# Altium PCB mini-ET.PcbDoc (part 2 of 2)
Units mil, origin at the board's own origin, x right, y up, seen from the top; angles counter-clockwise.
Board outline 6299 x 3937 mil, 4 copper layers (TopLayer, Gnd, Power, BottomLayer); 129 components, 151 nets, 650 pads, 100 vias.
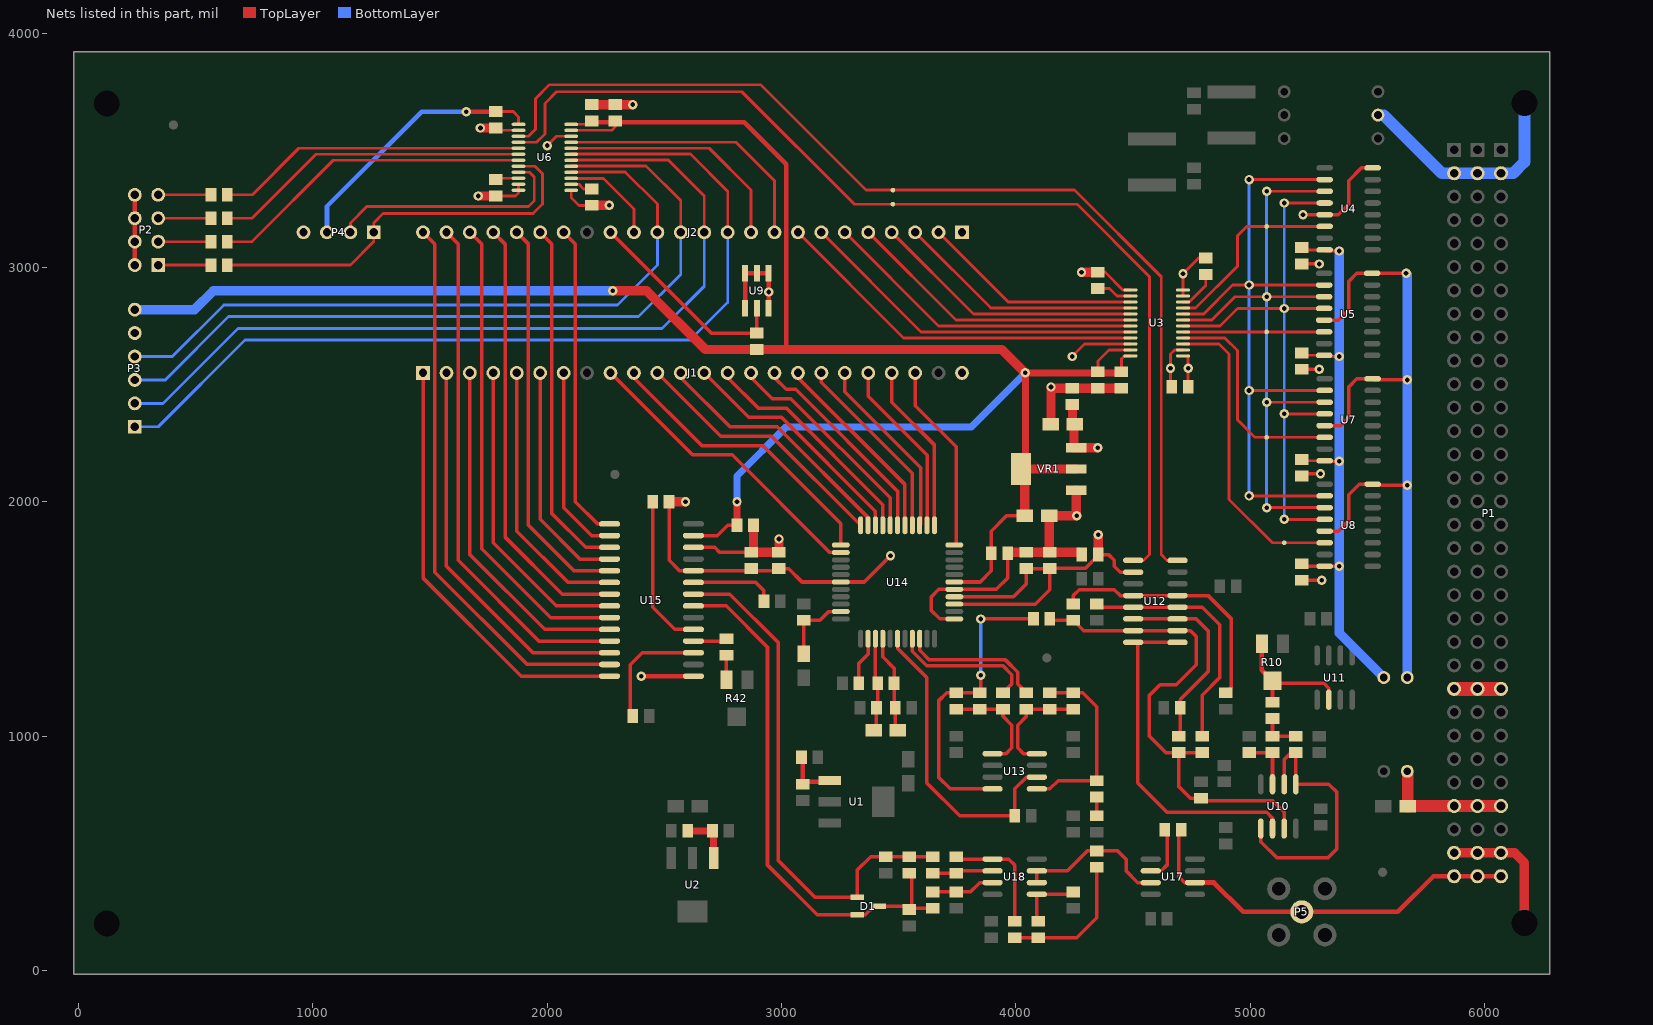
[diagram p4: the nets of this part, all layers, seen from the top]

## Via types
v1: diameter 40, hole 20, TopLayer to BottomLayer, 98 vias
v2: diameter 50, hole 28, TopLayer to BottomLayer, 2 vias

## Nets (pads, with @x,y where several pads share a name; then routed paths per layer and width w, separated by ;. In a path a pad name is that pad's centre, name@x,y a point inside that pad or via, vN(x,y) a via of type N, cw(c..) or ccw(c..) an arc to the next point about the centre after c; other vN are vias at no path point) (continued)
DGND: C20.2 C21.1 C22.1 C23.1 C24.1 C29.1 C30.1 C31.1 C32.1 C33.1 C34.1 C35.1 C36.1 C37.2 C39.1 C40.1 C41.1 C42.1 C43.1 C44.1 J2.1 L5.2 P2.2 P2.4 P2.6 P2.8 P3.5 P4.4 R5.1 R6.2 R39.1 R40.2 U3.2 U3.11 U3.12 U3.13 U3.22 U4.8 U4.13 U5.8 U5.13 U6.2 U6.11 U6.12 U6.13 U6.22 U7.8 U7.13 U8.8 U8.13 U9.1 U9.3 U9.4 U9.5 U9.6 U14.1 U14.5 U15.15 U15.26 VR1.1 | length 9099.2
  TopLayer w12: R39.1@1780,3304.96 1864.96,3304.96 1877.8,3317.8 U6.12@1877.8,3329.25 U6.11@1877.8,3354.84 ; C23.1@1780,3594.96 1789.8,3585.16 U6.2@1877.8,3585.16 ; v1(2000,3520) 2039.57,3559.57 U6.22@2102.2,3559.57 ; U6.13@2102.2,3329.25 2102.2,3297.8 2135.04,3264.96 R40.2@2190,3264.96 ; v1(4240,2620) 4293.43,2673.43 U3.22@4488.8,2673.43 ; R6.2@4350,2980.08 4379.92,2980.08 4456.25,2903.75 U3.13@4488.8,2903.75 ; C22.1@4664.96,2491.06 4660,2496.02 v1(4660,2570) 4660,2630 4677.84,2647.84 U3.2@4713.2,2647.84 ; U3.11@4713.2,2878.16 U3.12@4713.2,2903.75 v1(4713.2,2973.2) 4780.08,3040.08 R5.1@4810,3040.08
  TopLayer w15: U15.26@2624.13,1805.71 2714.29,1805.71 2734.96,1785.04 C33.1@2870,1785.04 ; U14.1@3737.13,1500.2 3674.61,1500.2 3639.8,1535 3639.8,1594.8 3671.18,1626.18 U14.5@3737.13,1626.18 3916.18,1626.18 3965.04,1675.04 C39.1@3965.04,1780 ; C29.1@5220,1664.96 v1(5304.96,1664.96) ; C30.1@5220,2110 5230,2120 v1(5300,2120) ; C31.1@5220,2564.96 v1(5295.04,2564.96) ; v1(5225,3225) U4.13@5317.64,3225 5375,3225 5420,3270 5420,3370 5475,3425 U4.8@5522.36,3425 ; C32.1@5234.96,3000 C32.1@5220,3014.96 v1(5294.96,3014.96) ; U5.13@5315.28,2775 5375,2775 5420,2820 5420,2940 5455,2975 U5.8@5520,2975 v1(5665,2975) ; U8.13@5317.64,1875 5375,1875 5420,1920 5420,2030 5465,2075 U8.8@5522.36,2075 5527.36,2070 v1(5670,2070) ; U7.13@5317.64,2325 5385,2325 5420,2360 5420,2490 5455,2525 U7.8@5522.36,2525 5527.36,2520 v1(5670,2520)
  TopLayer w20: P2.2@240,3010 P2.4@240,3110 P2.6@240,3210 P2.8@240,3310 ; v1(2400.71,1255.71) U15.15@2624.13,1255.71 ; U9.1@2845,2825.2 U9.6@2845,2974.8 U9.5@2895,2974.8 U9.4@2945,2974.8 v1(2945,2895) U9.3@2945,2825.2
  TopLayer w40: v1(1705.04,3304.96) R39.1@1780,3304.96 ; v1(1714.96,3594.96) C23.1@1780,3594.96 ; R40.2@2190,3264.96 v1(2265.04,3264.96) ; C42.1@2190,3695.04 C43.1@2290,3695.04 v1(2365.04,3695.04) ; C44.1@2880.04,1900 2880.04,1795.08 C33.1@2870,1785.04 C34.1@2988.9,1785.04 v1(2988.9,1841.1) ; C39.1@3975,1785.04 C36.1@4045,1785.04 C35.1@4145,1785.04 ; C20.2@4148.43,2330 4150,2331.57 v1(4150,2490) 4154.96,2485.04 C24.1@4240,2485.04 4305.04,2485.04 ; VR1.1@4258.11,2049.45 4258.11,1941.89 v1(4260,1940) C37.2@4141.57,1940 4141.57,1788.46 C35.1@4145,1785.04 ; v1(4280.08,2980.08) R6.2@4350,2980.08 ; C21.1@4281.02,1775 4270.98,1785.04 C35.1@4145,1785.04 ; 4309.92,2484.96 C41.1@4350,2484.96 C40.1@4450,2484.96
  BottomLayer w40: v1(5665,2975) 5670,2970 v1(5670,2520) v1(5670,2070) L5.2@5670,1250
DI0: J1.9 U14.24 | length 1300.3
  TopLayer w15: J1.9@2270,2550 2620,2200 2790,2200 3206.34,1783.66 U14.24@3252.87,1783.66
DI1: J1.10 U14.23 | length 1252.8
  TopLayer w15: J1.10@2370,2550 2370,2530 2660,2240 2920,2240 3252.87,1907.13 U14.23@3252.87,1815.16
DI2: J1.11 U14.22 | length 1136.8
  TopLayer w15: J1.11@2470,2550 2740,2280 2957.32,2280 U14.22@3337.52,1899.8
DI3: J1.12 U14.21 | length 1099.6
  TopLayer w15: J1.12@2570,2550 2570,2530 2780,2320 2982.11,2320 3369.02,1933.1 U14.21@3369.02,1899.8
DI4: J1.13 U14.20 | length 1034.8
  TopLayer w15: J1.13@2670,2550 2860,2360 3000,2360 3400.51,1959.49 U14.20@3400.51,1899.8
DI5: J1.14 U14.19 | length 994.7
  TopLayer w15: J1.14@2770,2550 2770,2530 2900,2400 3020,2400 3432.01,1987.99 U14.19@3432.01,1899.8
DI6: J1.15 U14.18 | length 942.9
  TopLayer w15: J1.15@2870,2550 2870,2530 2960,2440 3040,2440 3463.5,2016.5 U14.18@3463.5,1899.8
DI7: J1.16 U14.17 | length 891.1
  TopLayer w15: J1.16@2970,2550 2970,2530 3020,2480 3060,2480 3495,2045 U14.17@3495,1899.8
DI8: J1.17 U14.16 | length 839.3
  TopLayer w15: J1.17@3070,2550 3070,2530 3526.5,2073.5 U14.16@3526.5,1899.8
DI9: J1.18 U14.15 | length 810.9
  TopLayer w15: J1.18@3170,2550 3170,2510 3557.99,2122.01 U14.15@3557.99,1899.8
DI10: J1.19 U14.14 | length 786.8
  TopLayer w15: J1.19@3270,2550 3270,2470 3594.66,2145.34 3594.66,1904.97 U14.14@3589.49,1899.8
DI11: J1.20 U14.13 | length 754.2
  TopLayer w15: J1.20@3370,2550 3370,2450 3620.98,2199.02 U14.13@3620.98,1899.8
DI12: J1.21 U14.12 | length 739.9
  TopLayer w15: J1.21@3480,2540 J1.21@3470,2550 3470,2425 3652.48,2242.52 U14.12@3652.48,1899.8
DI13: J1.22 U14.11 | length 810.6
  TopLayer w15: J1.22@3570,2550 3570,2410 3745,2235 3745,1823.03 U14.11@3737.13,1815.16
DO0: J1.1 U15.14 | length 1844.5
  TopLayer w15: J1.1@1470,2550 1470,1675 1889.29,1255.71 U15.14@2265.87,1255.71
DO1: J2.24 U15.13 | length 2379.9
  TopLayer w15: J2.24@1470,3150 1520,3100 1520,1700 1914.29,1305.71 U15.13@2265.87,1305.71
DO2: J1.2 U15.12 | length 1673.8
  TopLayer w15: J1.2@1570,2550 1570,1725 1939.29,1355.71 U15.12@2265.87,1355.71
DO3: J2.23 U15.11 | length 2209.2
  TopLayer w15: J2.23@1570,3150 1620,3100 1620,1750 1964.29,1405.71 U15.11@2265.87,1405.71
DO4: J1.3 U15.10 | length 1503.1
  TopLayer w15: J1.3@1670,2550 1670,1775 1989.29,1455.71 U15.10@2265.87,1455.71
DO5: J2.22 U15.9 | length 2038.5
  TopLayer w15: J2.22@1670,3150 1720,3100 1720,1800 2014.29,1505.71 U15.9@2265.87,1505.71
DO6: J1.4 U15.8 | length 1332.4
  TopLayer w15: J1.4@1770,2550 1770,1825 2039.29,1555.71 U15.8@2265.87,1555.71
DO7: J2.21 U15.7 | length 1867.8
  TopLayer w15: J2.21@1770,3150 1820,3100 1820,1850 2064.29,1605.71 U15.7@2265.87,1605.71
DO8: J1.5 U15.6 | length 1161.7
  TopLayer w15: J1.5@1870,2550 1870,1875 2089.29,1655.71 U15.6@2265.87,1655.71
DO9: J2.20 U15.5 | length 1711.2
  TopLayer w15: J2.20@1880,3160 J2.20@1870,3150 1920,3100 1920,1900 2114.29,1705.71 U15.5@2265.87,1705.71
DO10: J1.6 U15.4 | length 991
  TopLayer w15: J1.6@1970,2550 1970,1925 2139.29,1755.71 U15.4@2265.87,1755.71
DO11: J2.19 U15.3 | length 1526.3
  TopLayer w15: J2.19@1970,3150 2020,3100 2020,1950 2164.29,1805.71 U15.3@2265.87,1805.71
DO12: J1.7 U15.2 | length 820.3
  TopLayer w15: J1.7@2070,2550 2070,1975 2189.29,1855.71 U15.2@2265.87,1855.71
DO13: J2.18 U15.1 | length 1355.6
  TopLayer w15: J2.18@2070,3150 2120,3100 2120,2000 2214.29,1905.71 U15.1@2265.87,1905.71
GND: C19.2 L2.1 L5.1 P1.97 P1.98 P1.A2 P1.A24 P1.A29 P1.A31 P1.B2 P1.B24 P1.B29 P1.B31 P1.C2 P1.C24 P1.C29 P1.C31 | length 2324.9
  TopLayer w40: P1.C31@5870,502 P1.B31@5970,502 P1.A31@6070,502 6128,502 6170,460 P1.98@6170,202
  TopLayer w50: L5.1@5670,850 5671.57,848.43 C19.2@5671.57,700 5673.57,702 P1.C29@5870,702 P1.B29@5970,702 P1.A29@6070,702
  TopLayer w60: P1.C24@5870,1202 P1.B24@5970,1202 P1.A24@6070,1202
  BottomLayer w50: L2.1@5545,3650 5570,3650 5818,3402 P1.C2@5870,3402 P1.B2@5970,3402 P1.A2@6070,3402 6122,3402 6170,3450 P1.97@6170,3702
IFF: J2.16 R9.2 U9.2 | length 908.3
  TopLayer w15: J2.16@2270,3150 2699.96,2720.04 R9.2@2895,2720.04 U9.2@2895,2825.2
LED0: J2.11 P3.1 U6.19 | length 3958.3
  TopLayer w12: U6.19@2102.2,3484.18 2610.82,3484.18 2770,3325 J2.11@2770,3150
  BottomLayer w12: P3.1@240,2320 340,2320 710,2690 2610,2690 2770,2850 J2.11@2770,3150
LED0B: R7.2 U6.5 | length 1324.9
  TopLayer w12: R7.2@635.04,3310 741.61,3310 940,3508.39 U6.5@1877.8,3508.39
LED1: J2.12 P3.2 U6.18 | length 3653.5
  TopLayer w12: U6.18@2102.2,3458.59 2516.41,3458.59 2670,3305 J2.12@2670,3150
  BottomLayer w12: P3.2@240,2420 360,2420 680,2740 2490,2740 2670,2920 J2.12@2670,3150
LED1B: R8.2 U6.6 | length 1355.8
  TopLayer w12: R8.2@635.04,3210 740,3210 1012.8,3482.8 U6.6@1877.8,3482.8
LED2: J2.13 P3.3 U6.17 | length 3360.5
  TopLayer w12: U6.17@2102.2,3433 2422,3433 2570,3285 J2.13@2570,3150
  BottomLayer w12: P3.3@240,2520 370,2520 640,2790 2390,2790 2570,2970 J2.13@2570,3150
LED2B: R30.1 U6.7 | length 1386.6
  TopLayer w12: R30.1@635.04,3110 740,3110 1087.2,3457.2 U6.7@1877.8,3457.2
MS: R13.2 R14.2 R15.2 R21.1 R25.2 U10.7 U12.7 U12.10 | length 2168.9
  TopLayer w15: R21.1@4145,1500 4151.1,1493.9 R15.2@4245,1493.9 4288.9,1450 U12.7@4500.51,1450 U12.10@4689.49,1450 4745,1450 4770,1425 4770,1305 4685,1220 4615,1220 4570,1175 4570,1000 4640.08,929.92 R13.2@4695,929.92 ; R14.2@4795,929.92 R13.2@4695,929.92 ; U10.7@5145,605.51 5145,675 5095,725 4799.96,725 R25.2@4790,734.96 4745.04,734.96 4695,785 R13.2@4695,929.92
NetC45_1: C45.1 R11.2 R12.1 | length 150
  TopLayer w15: R11.2@5095,1074.96 R12.1@5095,1000 C45.1@5170,1000
NetC45_2: C45.2 U10.1 U10.2 U10.5 | length 1158.7
  TopLayer w15: U10.5@5045,605.51 5045,550 5115,480 5330,480 5370,520 5370,760 5335.51,794.49 U10.1@5195,794.49 C45.2@5195,929.92 5174.92,929.92 5145,900 U10.2@5145,794.49
NetC46_2: C46.2 R12.2 U10.3 | length 235.4
  TopLayer w15: C46.2@4995,929.92 R12.2@5095,929.92 U10.3@5095,794.49
NetC47_1: C47.1 R19.1 R24.2 U13.1 | length 809.9
  TopLayer w15: U13.1@4089.49,775 4145,775 4180.04,810.04 R24.2@4345,810.04 4345,1125 4284.96,1185.04 C47.1@4245,1185.04 R19.1@4145,1185.04
NetC48_1: C48.1 R20.1 R21.2 U13.8 | length 1307.7
  TopLayer w15: v1(3850,1260) 3850,1190.04 C48.1@3845,1185.04 R20.1@3745,1185.04 3705.04,1185.04 3670,1150 3670,825 3720,775 U13.8@3900.51,775 ; v1(3850,1500) R21.2@4074.92,1500
  BottomLayer w15: v1(3850,1260) v1(3850,1500)
NetC49_1: C49.1 C50.1 C52.2 U14.37 | length 417.3
  TopLayer w15: U14.37@3432.01,1415.55 3432.01,1337.99 3480.04,1289.96 C52.2@3480.04,1225 3480.04,1125.98 C49.1@3484.96,1121.06 3484.96,1036.61 C50.1@3496.57,1025
NetC50_2: C50.2 C52.1 C53.1 U14.36 | length 401.3
  TopLayer w15: C50.2@3393.43,1025 3405.04,1036.61 C53.1@3405.04,1121.06 3409.96,1125.98 C52.1@3409.96,1225 3400.51,1234.45 U14.36@3400.51,1415.55
NetC51_2: C51.2 U13.2 U14.39 | length 1330.5
  TopLayer w15: U14.39@3495,1415.55 3495,1375 3620,1250 3620,800 3759.96,660.04 C51.2@3994.96,660 3995,775 4045,825 U13.2@4089.49,825
NetC54_1: C54.1 C55.2 U14.32 | length 315.9
  TopLayer w15: C54.1@3095,1351.57 C55.2@3095,1493.9 3163.9,1493.9 3201.69,1531.69 U14.32@3252.87,1531.69
NetC56_1: C56.1 D1.1 D1.2 R31.1 R33.2 U15.21 | length 2273.9
  TopLayer w15: U15.21@2624.13,1555.71 2764.29,1555.71 2940,1380 2940,450 3152.4,237.6 D1.2@3323.74,237.6 3357.6,237.6 3395,275 D1.1@3416.26,275 3530.04,275 R33.2@3545,260.04 ; C56.1@3545,414.96 3555.04,404.92 3555.04,271.06 3561.14,264.96 R31.1@3645,264.96
NetC56_2: C56.2 D1.3 R28.1 R29.1 U15.22 | length 2241
  TopLayer w15: U15.22@2624.13,1605.71 2779.29,1605.71 2985,1400 2985,470 3142.6,312.4 D1.3@3323.74,312.4 3323.74,428.74 3380.04,485.04 R28.1@3445,485.04 C56.2@3545,485.04 R29.1@3645,485.04
NetC57_2: C57.2 U15.17 | length 513.4
  TopLayer w15: C57.2@2364.96,1085.83 2355,1095.8 2355,1305 2405.71,1355.71 U15.17@2624.13,1355.71
NetC58_1: C58.1 U15.19 | length 663.2
  TopLayer w15: C58.1@2449.92,2000 2449.92,1550.08 2544.29,1455.71 U15.19@2624.13,1455.71
NetC59_2: C59.2 U15.23 | length 360.6
  TopLayer w15: U15.23@2624.13,1655.71 2889.29,1655.71 2924.92,1620.08 C59.2@2924.92,1575
NetC60_1: C60.1 R38.2 R41.1 | length 600.2
  TopLayer w15: R38.2@3995,139.96 R41.1@4095,139.96 4259.96,139.96 4345,225 C60.1@4345,439.96
NetC60_2: C60.2 U17.3 U18.6 U18.7 | length 656.5
  TopLayer w15: U18.6@4089.49,375 U18.7@4089.49,425 4220,425 4305.04,510.04 C60.2@4345,510.04 4434.96,510.04 4470,475 4470,425 4520,375 U17.3@4575.51,375
NetC61_2: C61.2 R41.2 U18.5 | length 276.9
  TopLayer w15: R41.2@4095,210.04 4089.49,215.55 U18.5@4089.49,325 C61.2@4234.96,325
  TopLayer w20: C61.2@4234.96,325 C61.2@4245,335.04
NetP2_1: P2.1 R34.1 | length 225
  TopLayer w12: P2.1@340,3010 R34.1@564.96,3010
NetP2_3: P2.3 R30.2 | length 225
  TopLayer w12: P2.3@340,3110 R30.2@564.96,3110
NetP2_5: P2.5 R8.1 | length 225
  TopLayer w12: P2.5@340,3210 R8.1@564.96,3210
NetP2_7: P2.7 R7.1 | length 225
  TopLayer w12: P2.7@340,3310 R7.1@564.96,3310
NetR1_1: R1.1 R2.2 U1.1 | length 235.2
  TopLayer w20: R2.2@3084.96,910 3090,904.96 R1.1@3090,805.04 ; R1.1@3090,795.04 R1.1@3090,805.04 ; U1.1@3205.83,810.55 3200.31,805.04 R1.1@3090,805.04
NetR3_1: R3.1 R4.2 U2.1 | length 214.6
  TopLayer w30: R4.2@2600,596.06 2690,596.06 2710.55,575.51 U2.1@2710.55,480
NetR5_2: R5.2 U3.10 | length 173.1
  TopLayer w12: U3.10@4713.2,2852.57 4739.79,2852.57 4810,2922.77 R5.2@4810,2970
NetR6_1: R6.1 U3.14 | length 152
  TopLayer w12: R6.1@4350,2910 4400,2910 4431.84,2878.16 U3.14@4488.8,2878.16
NetR10_CCW: R10.CCW R10.W R11.1 U11.6 | length 565.2
  TopLayer w15: R11.1@5095,1145.04 R10.W@5095,1225 ; R10.W@5095,1236.26 R10.W@5095,1225 ; U11.6@5335,1155.51 5335,1205 5315,1225 R10.W@5095,1225
  TopLayer w20: R10.CCW@5049.72,1393.74 5049.72,1281.54 R10.W@5095,1236.26
NetR13_1: R13.1 R16.2 U12.6 U12.11 | length 842
  TopLayer w15: U12.6@4500.51,1500 U12.11@4689.49,1500 4770,1500 4820,1450 4820,1275 4701.1,1156.1 R16.2@4701.1,1121.06 4701.1,1006.1 R13.1@4695,1000
NetR14_1: R14.1 R17.2 U12.5 U12.12 | length 1067.9
  TopLayer w15: R17.2@4345,1563.98 4358.98,1550 U12.5@4500.51,1550 U12.12@4689.49,1550 4795,1550 4870,1475 4870,1250 4795,1175 R14.1@4795,1000
NetR15_1: R15.1 R18.2 U12.4 U12.13 | length 1077.4
  TopLayer w15: R15.1@4245,1585.04 4245,1600 4270,1625 4420,1625 4445,1600 U12.4@4500.51,1600 U12.13@4689.49,1600 4820,1600 4920,1500 4920,1210.04 R18.2@4895,1185.04
NetR24_1: R24.1 R26.2 | length 79.9
  TopLayer w15: R26.2@4345,660.04 R24.1@4345,739.96
NetR27_1: R27.1 U14.35 | length 206.7
  TopLayer w15: R27.1@3330.04,1225 3330.04,1310.04 3369.02,1349.02 U14.35@3369.02,1415.55
NetR29_2: R29.2 R36.2 U18.2 | length 259.7
  TopLayer w15: R29.2@3645,414.96 R36.2@3745,414.96 3755.04,425 U18.2@3900.51,425
NetR31_2: R31.2 R35.1 U18.3 | length 272.1
  TopLayer w15: R31.2@3645,335.04 R35.1@3745,335.04 3805.04,335.04 3845,375 U18.3@3900.51,375
NetR32_1: R32.1 R42.CCW | length 105.2
  TopLayer w15: R42.CCW@2764.45,1240 2765,1240.55 R32.1@2765,1344.96
NetR32_2: R32.2 U15.18 | length 140.2
  TopLayer w15: U15.18@2624.13,1405.71 R32.2@2764.29,1405.71
NetR36_1: R36.1 R38.1 U18.1 | length 504.5
  TopLayer w15: R36.1@3755.04,475 U18.1@3900.51,475 3970,475 3995,450 R38.1@3995,210.04
  TopLayer w20: R36.1@3745,485.04 R36.1@3755.04,475
NetR37_1: R37.1 U17.2 | length 234
  TopLayer w15: U17.2@4575.51,425 4620,425 4645,450 4645,589.96 R37.1@4634.96,600
NetR39_2: R39.2 U6.10 | length 100
  TopLayer w12: R39.2@1780,3375.04 1785.39,3380.43 U6.10@1877.8,3380.43
NetR40_1: R40.1 U6.14 | length 96
  TopLayer w12: U6.14@2102.2,3354.84 2135.16,3354.84 2154.96,3335.04 R40.1@2190,3335.04
NetU10_6: U10.6 U12.8 U12.9 | length 1470.6
  TopLayer w15: U12.8@4500.51,1400 U12.8@4520,1400 ; U12.9@4689.49,1400 U12.8@4520,1400 ; U10.6@5095,605.51 5095,650 5070,675 4645,675 4520,800 U12.8@4520,1400
OUT_N: C48.2 R20.2 R22.1 U13.5 | length 472.8
  TopLayer w15: R20.2@3745,1114.96 C48.2@3845,1114.96 R22.1@3945,1114.96 3945,1084.63 3982.5,1047.13 3982.5,950 3957.5,925 U13.5@3900.51,925
OUT_P: C47.2 R19.2 R23.1 U13.4 | length 472.8
  TopLayer w15: U13.4@4089.49,925 4032.5,925 4007.5,950 4007.5,1047.13 4045,1084.63 R23.1@4045,1114.96 R19.2@4145,1114.96 C47.2@4245,1114.96
PGA0: J2.10 U6.20 | length 1021.7
  TopLayer w12: U6.20@2102.2,3508.39 2691.61,3508.39 2870,3330 J2.10@2870,3150
PGA0B: pad.8 U6.4 U12.1 | length 4449.9
  TopLayer w12: U6.4@1877.8,3533.98 1953.98,3533.98 1990,3570 1990,3700 2040,3750 2830,3750 3310,3270 pad.8@3475,3270 4260,3270 4570,2960 4570,1775 4545,1750 U12.1@4500.51,1750
PGA1: J2.9 U6.21 | length 1155.7
  TopLayer w12: U6.21@2102.2,3533.98 2806.02,3533.98 2970,3370 J2.9@2970,3150
PGA1B: pad.7 U6.3 U12.16 | length 4514.2
  TopLayer w12: U6.3@1877.8,3559.57 1919.57,3559.57 1950,3590 1950,3720 2010,3780 2910,3780 3360,3330 pad.7@3475,3330 4250,3330 4620,2960 4620,1775 4645,1750 U12.16@4689.49,1750
RCLK: J2.5 U3.18 | length 1273.8
  TopLayer w12: J2.5@3370,3150 3744.2,2775.8 U3.18@4488.8,2775.8
RCLKB: U3.6 U4.12 U5.12 U7.12 U8.12 | length 2501
  TopLayer w12: U3.6@4713.2,2750.2 4870.2,2750.2 4945,2825 v1(5145,2825) U5.12@5315.28,2825 ; v1(5145,1925) U8.12@5317.64,1925 ; v1(5145,2375) U7.12@5317.64,2375 ; v1(5145,3275) U4.12@5317.64,3275
  BottomLayer w12: v1(5145,1925) v1(5145,2375) v1(5145,2825) v1(5145,3275)
SCL: J2.14 P3.4 U6.16 | length 3076.3
  TopLayer w12: U6.16@2102.2,3407.41 2332.59,3407.41 2470,3270 J2.14@2470,3150
  BottomLayer w12: P3.4@240,2620 400,2620 620,2840 2300,2840 2470,3010 J2.14@2470,3150
SCLB/LED3B: P4.1 R34.2 U6.8 | length 1744.8
  TopLayer w12: R34.2@635.04,3010 1160,3010 1260,3110 P4.1@1260,3150 1260,3190 1300,3230 1940,3230 1980,3270 1980,3400 1948.39,3431.61 U6.8@1877.8,3431.61
SDA: J2.15 U6.15 | length 421.8
  TopLayer w12: U6.15@2102.2,3380.43 2102.64,3380 2240,3380 2370,3250 J2.15@2370,3150
SDAB: P4.2 U6.9 | length 1040.3
  TopLayer w12: P4.2@1160,3150 1160,3190 1230,3260 1920,3260 1945,3285 1945,3385 1923.98,3406.02 U6.9@1877.8,3406.02
SER0: J2.2 U3.15 | length 942
  TopLayer w12: J2.2@3670,3150 3967.43,2852.57 U3.15@4488.8,2852.57
SER0B: pad.3 U3.9 U4.14 | length 824.7
  TopLayer w12: U3.9@4713.2,2826.98 4766.98,2826.98 4945,3005 4945,3135 4985,3175 pad.3@5070,3175 U4.14@5317.64,3175
SER1: J2.6 U3.19 | length 1384.4
  TopLayer w12: J2.6@3270,3150 3669.8,2750.2 U3.19@4488.8,2750.2
SER1B: pad.4 U3.5 U5.14 | length 599.7
  TopLayer w12: U3.5@4715.59,2725 pad.4@5070,2725 U5.14@5315.28,2725
SER2: J2.7 U3.20 | length 1495
  TopLayer w12: J2.7@3170,3150 3595.39,2724.61 U3.20@4488.8,2724.61
SER2B: pad.5 U3.4 U7.14 | length 952.9
  TopLayer w12: U3.4@4713.2,2699.02 4890.98,2699.02 4945,2645 4945,2350 5020,2275 pad.5@5070,2275 U7.14@5317.64,2275
SER3: J2.8 U3.21 | length 1605.6
  TopLayer w12: J2.8@3070,3150 3520.98,2699.02 U3.21@4488.8,2699.02
SER3B: pad.6 U3.3 U8.14 | length 1319.1
  TopLayer w12: U3.3@4713.2,2673.43 4866.57,2673.43 4910,2630 4910,2010 5095,1825 pad.6@5145,1825 U8.14@5317.64,1825
SIG: P1.A32 P1.B32 P1.C32 P5.1 R37.2 U17.6 | length 1704.3
  TopLayer w15: R37.2@4705.04,600 4695,589.96 4695,400 4720,375 U17.6@4764.49,375
  TopLayer w20: U17.6@4764.49,375 4845,375 4970,250 P5.1@5220,250 5630,250 5782,402 P1.C32@5870,402 P1.B32@5970,402 P1.A32@6070,402
SRCLK: J2.4 U3.17 | length 1163.2
  TopLayer w12: J2.4@3470,3150 3818.61,2801.39 U3.17@4488.8,2801.39
SRCLKB: U3.7 U4.11 U5.11 U7.11 U8.11 | length 2736.1
  TopLayer w12: U3.7@4713.2,2775.8 4835.8,2775.8 4935,2875 v1(5070,2875) U5.11@5315.28,2875 ; v1(5070,1975) U8.11@5317.64,1975 ; v1(5070,2425) U7.11@5317.64,2425 ; v1(5070,3325) U4.11@5317.64,3325
  BottomLayer w12: v1(5070,1975) v1(5070,2425) v1(5070,2875) v1(5070,3325)
SRCLR: J2.3 U3.16 | length 1052.6
  TopLayer w12: J2.3@3570,3150 3893.02,2826.98 U3.16@4488.8,2826.98
SRCLRB: U3.8 U4.10 U5.10 U7.10 U8.10 | length 2974.3
  TopLayer w12: U3.8@4713.2,2801.39 4801.39,2801.39 4925,2925 v1(4995,2925) U5.10@5315.28,2925 ; v1@4992.8,2472.8 v1(4995,2475) U7.10@5317.64,2475 ; v1(4995,2025) U8.10@5317.64,2025 ; v1(4995,3375) U4.10@5317.64,3375
  BottomLayer w12: v1(4995,2025) v1(4995,2475) v1(4995,2925) v1(4995,3375)
VCCO: C37.1 C39.2 C40.2 C41.2 C42.2 C43.2 C44.2 P3.6 R9.1 U3.23 U3.24 U6.23 U6.24 U14.6 U15.27 VR1.2 | length 10042.9
  TopLayer w12: U6.23@2102.2,3585.16 2275.16,3585.16 2290,3600 2290,3620 C43.2@2290,3624.96 ; U6.24@2102.2,3610.75 2175.79,3610.75 C42.2@2190,3624.96 ; C41.2@4350,2555.04 4350,2600 4397.84,2647.84 U3.23@4488.8,2647.84 ; C40.2@4450,2560 4450,2610 4462.25,2622.25 U3.24@4488.8,2622.25
  TopLayer w15: U15.27@2624.13,1855.71 2725.71,1855.71 2770,1900 C44.2@2809.96,1900 ; U14.6@3737.13,1657.68 3847.68,1657.68 3894.96,1704.96 C39.2@3894.96,1780 3894.96,1874.96 3960,1940 C37.1@4038.43,1940
  TopLayer w20: C42.2@2190,3624.96 2194.96,3620 2290,3620 2840,3620 3020,3440 3020,2655 3025,2650
  TopLayer w30: C44.2@2809.96,1900 v1(2809.96,2000) ; VR1.2@4021.89,2140 4050,2168.11 4040,2178.11 v1(4040,2550) 4440,2550 C40.2@4450,2560
  TopLayer w40: v1(2280,2900) 2425,2900 2675.04,2649.96 2820,2649.96 ; 2820,2650 3025,2650 3940,2650 v1(4040,2550) ; C37.1@4038.43,1940 4038.43,2113.46 4011.89,2140 VR1.2@4021.89,2140 VR1.2@4258.11,2140
  BottomLayer w20: 495,2820 500,2820 577.5,2897.5
  BottomLayer w30: v1(2809.96,2000) 2809.96,2109.96 3020,2320 3810,2320 v1(4040,2550)
  BottomLayer w40: P3.6@240,2820 495,2820 575,2900 v1(2280,2900)
VIN_N: R23.2 U14.42 | length 609.6
  TopLayer w15: U14.42@3589.49,1415.55 3589.49,1365.87 3630.36,1325 3955.36,1325 4007.5,1272.86 4007.5,1222.54 R23.2@4045,1185.04
VIN_P: R22.2 U14.41 | length 612.3
  TopLayer w15: U14.41@3557.99,1415.55 3557.99,1362.01 3620,1300 3945,1300 3982.5,1262.5 3982.5,1222.54 R22.2@3945,1185.04
VU: C20.1 C21.2 C22.2 C23.2 C24.2 C29.2 C30.2 C31.2 C32.2 C33.2 C34.2 C35.2 C36.2 C58.2 J1.24 L4.2 P4.3 U3.1 U4.16 U5.16 U6.1 U7.16 U8.16 U12.2 U14.3 U14.4 U14.28 U15.24 VR1.3 | length 6899.2
  TopLayer w12: C23.2@1780,3665.04 1854.96,3665.04 1877.8,3642.2 U6.1@1877.8,3610.75 ; C22.2@4735.04,2491.06 v1(4735.04,2570) U3.1@4735.04,2623 ; C30.2@5234.96,2175 U7.16@5317.64,2175 5320.14,2172.5 v1(5380,2172.5) ; C31.2@5234.96,2625 U5.16@5315.28,2625 5320.28,2620 v1(5380,2620) ; C32.2@5234.96,3075 U4.16@5317.64,3075 5322.64,3070 v1(5380,3070)
  TopLayer w15: C58.2@2520,2000 2520,1750 2564.29,1705.71 U15.24@2624.13,1705.71 C34.2@2995,1705.71 ; C34.2@2995,1714.96 3030.04,1714.96 3087.32,1657.68 U14.28@3252.87,1657.68 3352.68,1657.68 v1(3465,1770) ; U14.3@3737.13,1563.19 4083.19,1563.19 4145,1625 C35.2@4145,1714.96 ; U14.4@3737.13,1594.69 3989.69,1594.69 4045,1650 C36.2@4045,1714.96 C35.2@4145,1714.96 ; U12.2@4500.51,1700 4445,1700 4420,1725 4420,1750 4395,1775 C21.2@4351.1,1775 4351.1,1771.39 4295.22,1715.5 4145,1715.5 C35.2@4145,1714.96 ; C29.2@5234.96,1725 U8.16@5317.64,1725 v1(5380,1725)
  TopLayer w20: v1(1655.04,3665.04) C23.2@1780,3665.04
  TopLayer w40: C58.2@2520,2000 v1(2590,2000) ; C20.1@4241.57,2330 C24.2@4241.57,2416.54 ; C20.1@4248.11,2313.46 4248.11,2230.55 VR1.3@4248.66,2230 ; VR1.3@4258.11,2230.55 v1(4349.45,2230.55) ; C21.2@4351.1,1775 v1(4351.1,1858.9)
  BottomLayer w20: P4.3@1060,3150 1060,3260 1465.04,3665.04 v1(1655.04,3665.04)
  BottomLayer w40: v1(5380,3070) v1(5380,2620) v1(5380,2172.5) v1(5380,1725) 5380,1440 L4.2@5570,1250
pads on no net: P1.A20 P1.A22 P1.A23 P1.A25 P1.A26 P1.A27 P1.A28 P1.B4 P1.B5 P1.B6 P1.B7 P1.B8 P1.B9 P1.B10 P1.B11 P1.B12 P1.B13 P1.B14 P1.B15 P1.B16 P1.B17 P1.B18 P1.B19 P1.B20 P1.B22 P1.B23 P1.B25 P1.B26 P1.B27 P1.B28 P1.C20 P1.C22 P1.C23 P1.C25 P1.C26 P1.C27 P1.C28 U4.9 U5.9 U7.9 U8.9 U11.1 U11.5 U11.8 U13.7 U14.8 U14.9 U14.10 U14.26 U14.27 U14.30 U14.34 U14.38 U14.40 U14.43 U14.44 U15.25 U17.1 U17.5 U17.8

## Polygon pours and split planes (outlines as drawn)
AGND on BottomLayer "bottomlayer-AGND" (solid, remove dead copper, pour order 11): 2500,1640 3040,1640 3080,1600 3440,1600 3520,1520 4060,1520 4180,1640 5100,1640 5180,1560 6260,1560 6260,0 2500,0
DGND on BottomLayer "bottomlayer-DGND" (solid, remove dead copper, pour order 10): 0,3900 6260,3900 6260,1620 5200,1620 5080,1740 4145.04,1740 4005.04,1600 3580,1600 3480,1700 3100,1700 3060,1740 2440,1740 2440,0 0,0
AGND on TopLayer "toplayer-AGND" (solid, remove dead copper, pour order 5): 2500,1640 3040,1640 3080,1600 3440,1600 3520,1520 4060,1520 4180,1640 5100,1640 5180,1560 6260,1560 6260,0 2500,0
DGND on TopLayer "toplayer-DGND" (solid, remove dead copper, pour order 3): 0,3900 6260,3900 6260,1620 5200,1620 5080,1740 4145.04,1740 4005.04,1600 3580,1600 3480,1700 3100,1700 3060,1740 2440,1740 2440,0 0,0
GND on Gnd (split plane): 6258.9,112.09 5855.09,112.09 5855.09,1252 5855.09,1599.89 5855.1,1600 5855.09,1600.11 5855.09,3791.91 6258.9,3791.91
AGND on Gnd (split plane): 3065.79,1655.79 3068.83,1653.29 3072.31,1651.43 3076.08,1650.29 3080,1649.9 3461.68,1649.9 3545.79,1565.79 3548.83,1563.29 3552.31,1561.43 3556.08,1560.29 3560,1559.9 4040,1559.9 4043.92,1560.29 4047.69,1561.43 4051.17,1563.29 4054.21,1565.79 4168.32,1679.9 5071.68,1679.9 5165.79,1585.79 5168.83,1583.29 5172.31,1581.43 5176.08,1580.29 5180,1579.9 5834.91,1579.9 5834.91,1252 5834.91,1227 5834.91,102 5835.26,99.39 5836.26,96.96 5837.87,94.87 5839.96,93.27 5842.39,92.26 5845,91.91 6258.9,91.91 6258.9,3.1 2480.1,3.1 2480.1,1689.9 3031.68,1689.9
DGND on Gnd (split plane): 6258.9,3812.09 5845,3812.09 5842.39,3811.74 5839.96,3810.74 5837.87,3809.13 5836.26,3807.04 5835.26,3804.61 5834.91,3802 5834.91,1620.1 5188.32,1620.1 5094.21,1714.21 5091.17,1716.71 5087.69,1718.57 5083.92,1719.71 5080,1720.1 4160,1720.1 4156.08,1719.71 4152.31,1718.57 4148.83,1716.71 4145.79,1714.21 4031.68,1600.1 3568.32,1600.1 3484.21,1684.21 3481.17,1686.71 3477.69,1688.57 3473.92,1689.71 3470,1690.1 3088.32,1690.1 3054.21,1724.21 3051.17,1726.71 3047.69,1728.57 3043.92,1729.71 3040,1730.1 2460,1730.1 2456.08,1729.71 2452.31,1728.57 2448.83,1726.71 2445.79,1724.21 2443.29,1721.17 2441.43,1717.69 2440.29,1713.92 2439.9,1710 2439.9,3.1 0.1,3.1 0.1,3899.9 6258.9,3899.9
+12 on Power (split plane): 5399.9,475.09 2880.09,475.09 2880.09,1024.91 5399.9,1024.91
-12 on Power (split plane): 4920.01,160.18 2500.09,160.18 2500.09,394.91 4920.01,394.91
GND on Power (split plane): 6258.9,3.1 5715.46,3.1 5716.72,6.15 5718.59,12.63 5719.72,19.27 5720.09,26 5720.09,1600 5720.09,3150 5720.09,3877 5719.72,3883.73 5718.59,3890.37 5716.72,3896.85 5715.46,3899.9 6258.9,3899.9
AGND on Power (split plane): 3057.51,1627.51 3059.88,1625.39 3062.53,1623.02 3068.03,1619.12 3073.93,1615.86 3080.15,1613.28 3086.63,1611.41 3093.27,1610.28 3093.63,1610.26 3100,1609.91 3425.11,1609.91 3487.51,1547.51 3492.53,1543.02 3498.03,1539.12 3503.93,1535.86 3510.15,1533.28 3516.63,1531.41 3523.27,1530.28 3530,1529.91 4040,1529.91 4046.73,1530.28 4053.37,1531.41 4059.85,1533.28 4066.07,1535.86 4071.97,1539.12 4077.47,1543.02 4082.49,1547.51 4174.89,1639.91 5055.11,1639.91 5137.51,1557.51 5140.02,1555.26 5142.53,1553.02 5148.03,1549.12 5153.93,1545.86 5160.15,1543.28 5166.63,1541.41 5173.27,1540.28 5180,1539.91 5599.91,1539.91 5599.91,26 5600.28,19.27 5601.41,12.63 5603.28,6.15 5604.54,3.1 2499.41,3.1 2499.74,4.77 2500.09,10 2500.09,79.9 4960,79.9 4963.08,80.21 4965.33,80.35 4970.47,81.38 4975.44,83.06 4980.14,85.38 4984.5,88.29 4988.44,91.75 4991.9,95.69 4994.81,100.05 4997.13,104.76 4998.82,109.72 4999.84,114.86 5000.18,120.1 5000.18,394.91 5465,394.91 5470.23,395.26 5475.38,396.28 5480.34,397.97 5485.04,400.28 5489.4,403.2 5493.34,406.66 5496.8,410.6 5499.72,414.96 5502.03,419.66 5503.72,424.62 5504.74,429.77 5505.09,435 5505.09,1065 5504.74,1070.23 5503.72,1075.38 5502.03,1080.34 5499.72,1085.04 5496.8,1089.4 5493.34,1093.34 5489.4,1096.8 5485.04,1099.72 5480.34,1102.03 5475.38,1103.72 5470.23,1104.74 5465,1105.09 2840,1105.09 2834.77,1104.74 2829.62,1103.72 2824.66,1102.03 2819.96,1099.72 2815.6,1096.8 2811.66,1093.34 2808.2,1089.4 2805.28,1085.04 2802.97,1080.34 2801.28,1075.38 2800.26,1070.23 2799.91,1065 2799.91,475.09 2500.09,475.09 2500.09,1649.91 3035.11,1649.91
VU on Power (split plane): 4317.51,3107.51 4322.53,3103.02 4328.03,3099.12 4333.93,3095.86 4340.15,3093.28 4346.63,3091.41 4353.27,3090.28 4360,3089.91 5599.91,3089.91 5599.91,1660.09 5204.89,1660.09 5122.49,1742.49 5117.47,1746.98 5111.97,1750.88 5106.07,1754.14 5099.85,1756.72 5093.37,1758.59 5086.73,1759.72 5080,1760.09 4150,1760.09 4143.27,1759.72 4136.63,1758.59 4130.15,1756.72 4123.93,1754.14 4118.03,1750.88 4112.53,1746.98 4107.51,1742.49 4015.11,1650.09 3554.89,1650.09 3492.49,1712.49 3487.47,1716.98 3481.97,1720.88 3476.07,1724.14 3469.85,1726.72 3463.37,1728.59 3456.73,1729.72 3450,1730.09 3124.89,1730.09 3102.49,1752.49 3097.47,1756.98 3091.97,1760.88 3086.07,1764.14 3079.85,1766.72 3073.37,1768.59 3066.73,1769.72 3060,1770.09 850.09,1770.09 850.09,3249.91 4175.11,3249.91
DGND on Power (split plane): 5603.28,3896.85 5601.41,3890.37 5600.28,3883.73 5599.91,3877 5599.91,3210.09 4384.89,3210.09 4242.49,3352.49 4237.47,3356.98 4231.97,3360.88 4226.07,3364.14 4219.85,3366.72 4213.37,3368.59 4206.73,3369.72 4200,3370.09 790,3370.09 783.27,3369.72 776.63,3368.59 770.15,3366.72 763.93,3364.14 758.03,3360.88 752.53,3356.98 747.51,3352.49 743.02,3347.47 739.12,3341.97 735.86,3336.07 733.28,3329.85 731.41,3323.37 730.28,3316.73 729.91,3310 729.91,1710 730.28,1703.27 731.41,1696.63 733.28,1690.15 735.86,1683.93 739.12,1678.03 743.02,1672.53 747.51,1667.51 752.53,1663.02 758.03,1659.12 763.93,1655.86 770.15,1653.28 776.63,1651.41 783.27,1650.28 790,1649.91 2419.91,1649.91 2419.91,10 2420.26,4.77 2420.59,3.1 0.1,3.1 0.1,3899.9 5604.54,3899.9

## Other copper
Power (plane layer: these items are gaps in the copper):
  lines w40: 2450,100 4960,100 ; 2830,435 2830,1070 5420,1070 5420,450
  lines w80: 2460,10 2460,1705 ; 2460,435 2830,435 4960,435 5395,435 5465,435 5465,1065 2840,1065 2840,455 ; 2485,120.1 4960.1,120.1 4960.1,419.9
  lines w120: 5660,26 5660,1600 ; 5660,3877 5660,3150 ; 5660,1600 5180,1600 5080,1700 4150,1700 4040,1590 3530,1590 3450,1670 3100,1670 3060,1710 790,1710 790,3310 4200,3310 4360,3150 5660,3150 ; 5660,1600 5660,3150
Gnd (plane layer: these items are gaps in the copper):
  lines w20: 5845,1227 5845,3802 6268,3802 ; 5845,1252 5845,102 6275,102
  lines w40: 2460,-17 2460,1710 3040,1710 3080,1670 3470,1670 3560,1580 4040,1580 4160,1700 5080,1700 5180,1600 5835,1600

## Silkscreen, mask and mechanical layers (free items; w line width, h text height)
TopOverlay:
  circle w10: c120,200 r112.5
  circle w10: c120,3700 r112.5
  lines w8: 220,3802 220,3602 45,3602 45,302 220,302 220,102 6070,102 6070,302 6220,302 6220,3602 6070,3602 6070,3802
  lines w10: 220,3802 6070,3802
  text "+12" at 5735,3730 h40
  text "GND" at 5735,3620 h40
  text "-12" at 5715,3520 h40
  text "PIO34" at 2885,3230 h40 r90
  text "PIO33" at 2995,3230 h40 r90
  text "PIO48" at 1440,3090 h40 r270
  text "PIO47" at 1540.43,3090 h40 r270
  text "PIO46" at 1640.87,3090 h40 r270
  text "PIO45" at 1741.3,3090 h40 r270
  text "PIO44" at 1841.74,3090 h40 r270
  text "PIO43" at 1942.17,3090 h40 r270
  text "PIO42" at 2042.61,3090 h40 r270
  text "PIO41" at 2143.04,3090 h40 r270
  text "PIO40" at 2243.48,3090 h40 r270
  text "PIO39" at 2343.91,3090 h40 r270
  text "PIO38" at 2444.35,3090 h40 r270
  text "PIO37" at 2544.78,3090 h40 r270
  text "PIO36" at 2645.22,3090 h40 r270
  text "PIO35" at 2745.65,3090 h40 r270
  text "PIO32" at 3046.96,3090 h40 r270
  text "PIO31" at 3147.39,3090 h40 r270
  text "PIO30" at 3247.82,3090 h40 r270
  text "PIO29" at 3348.26,3090 h40 r270
  text "PIO28" at 3448.69,3090 h40 r270
  text "PIO27" at 3549.13,3090 h40 r270
  text "PIO26" at 3649.56,3090 h40 r270
  text "DGND" at 3750,3090 h40 r270
  text "DGND" at 165,3085 h40 r90
  text "DGND" at 940,3075 h40 r270
  text "VU" at 1043.33,3075 h40 r270
  text "SDAB" at 1146.67,3075 h40 r270
  text "SCLB" at 1250,3075 h40 r270
  text "VCCO" at 325,2795 h40
  text "DGND" at 325,2705 h40
  text "SCL" at 325,2600 h40
  text "LED2" at 325,2500 h40
  text "PIO01" at 1440,2480 h40 r270
  text "PIO02" at 1540.43,2480 h40 r270
  text "PIO03" at 1640.87,2480 h40 r270
  text "PIO04" at 1741.3,2480 h40 r270
  text "PIO05" at 1841.74,2480 h40 r270
  text "PIO06" at 1942.17,2480 h40 r270
  text "PIO07" at 2042.61,2480 h40 r270
  text "PIO08" at 2143.04,2480 h40 r270
  text "PIO09" at 2243.48,2480 h40 r270
  text "PIO10" at 2343.91,2480 h40 r270
  text "PIO11" at 2444.35,2480 h40 r270
  text "PIO12" at 2544.78,2480 h40 r270
  text "PIO13" at 2645.22,2480 h40 r270
  text "PIO14" at 2745.65,2480 h40 r270
  text "PIO15" at 2846.09,2480 h40 r270
  text "PIO16" at 2946.52,2480 h40 r270
  text "PIO17" at 3046.96,2480 h40 r270
  text "PIO18" at 3147.39,2480 h40 r270
  text "PIO19" at 3247.82,2480 h40 r270
  text "PIO20" at 3348.26,2480 h40 r270
  text "PIO21" at 3448.69,2480 h40 r270
  text "PIO22" at 3549.13,2480 h40 r270
  text "PIO23" at 3649.56,2480 h40 r270
  text "VU" at 3750,2480 h40 r270
  text "LED1" at 325,2400 h40
  text "LED0" at 325,2305 h40
  text "+5IN" at 5515,637 h40 r270
  text "GND" at 5655,605 h40 r270
  text "mini-ET" at 1105,585 h80
  text "CUIZIQIANG@TJU.EDU.CN" at 470,400 h80
  text "20171203" at 1055,195 h80
Mechanical1:
  the board outline again, w20
DrillDrawing:
  text "'.Legend'" at -5,3973 h40

## Text inside footprints (layer, text, board x,y; h text height)
P1: TopOverlay "C" at 5857.5,3552 h60; TopOverlay "B" at 5932.5,3552 h60; TopOverlay "A" at 6007.5,3552 h60; TopOverlay "C" at 5857.5,289.5 h60; TopOverlay "B" at 5945,289.5 h60; TopOverlay "A" at 6020,289.5 h60; TopOverlay "32" at 6220,352 h60 r90; TopOverlay "1" at 6220,3489.5 h60 r90
P2: TopOverlay "8" at 260,3370 h50 r90; TopOverlay "7" at 360,3370 h50 r90; TopOverlay "1" at 360,2930 h50 r90; TopOverlay "2" at 260,2910 h50 r90